# Altium PCB LEDA_Arcade Controller Mainboard (No Speaker).pcbdoc (part 2 of 2)
Units mil, origin at the board's own origin, x right, y up, seen from the top; angles counter-clockwise.
Board outline 4160.66 x 4159.61 mil, 2 copper layers (Top Layer, Bottom Layer); 47 components, 129 nets, 313 pads, 144 vias.
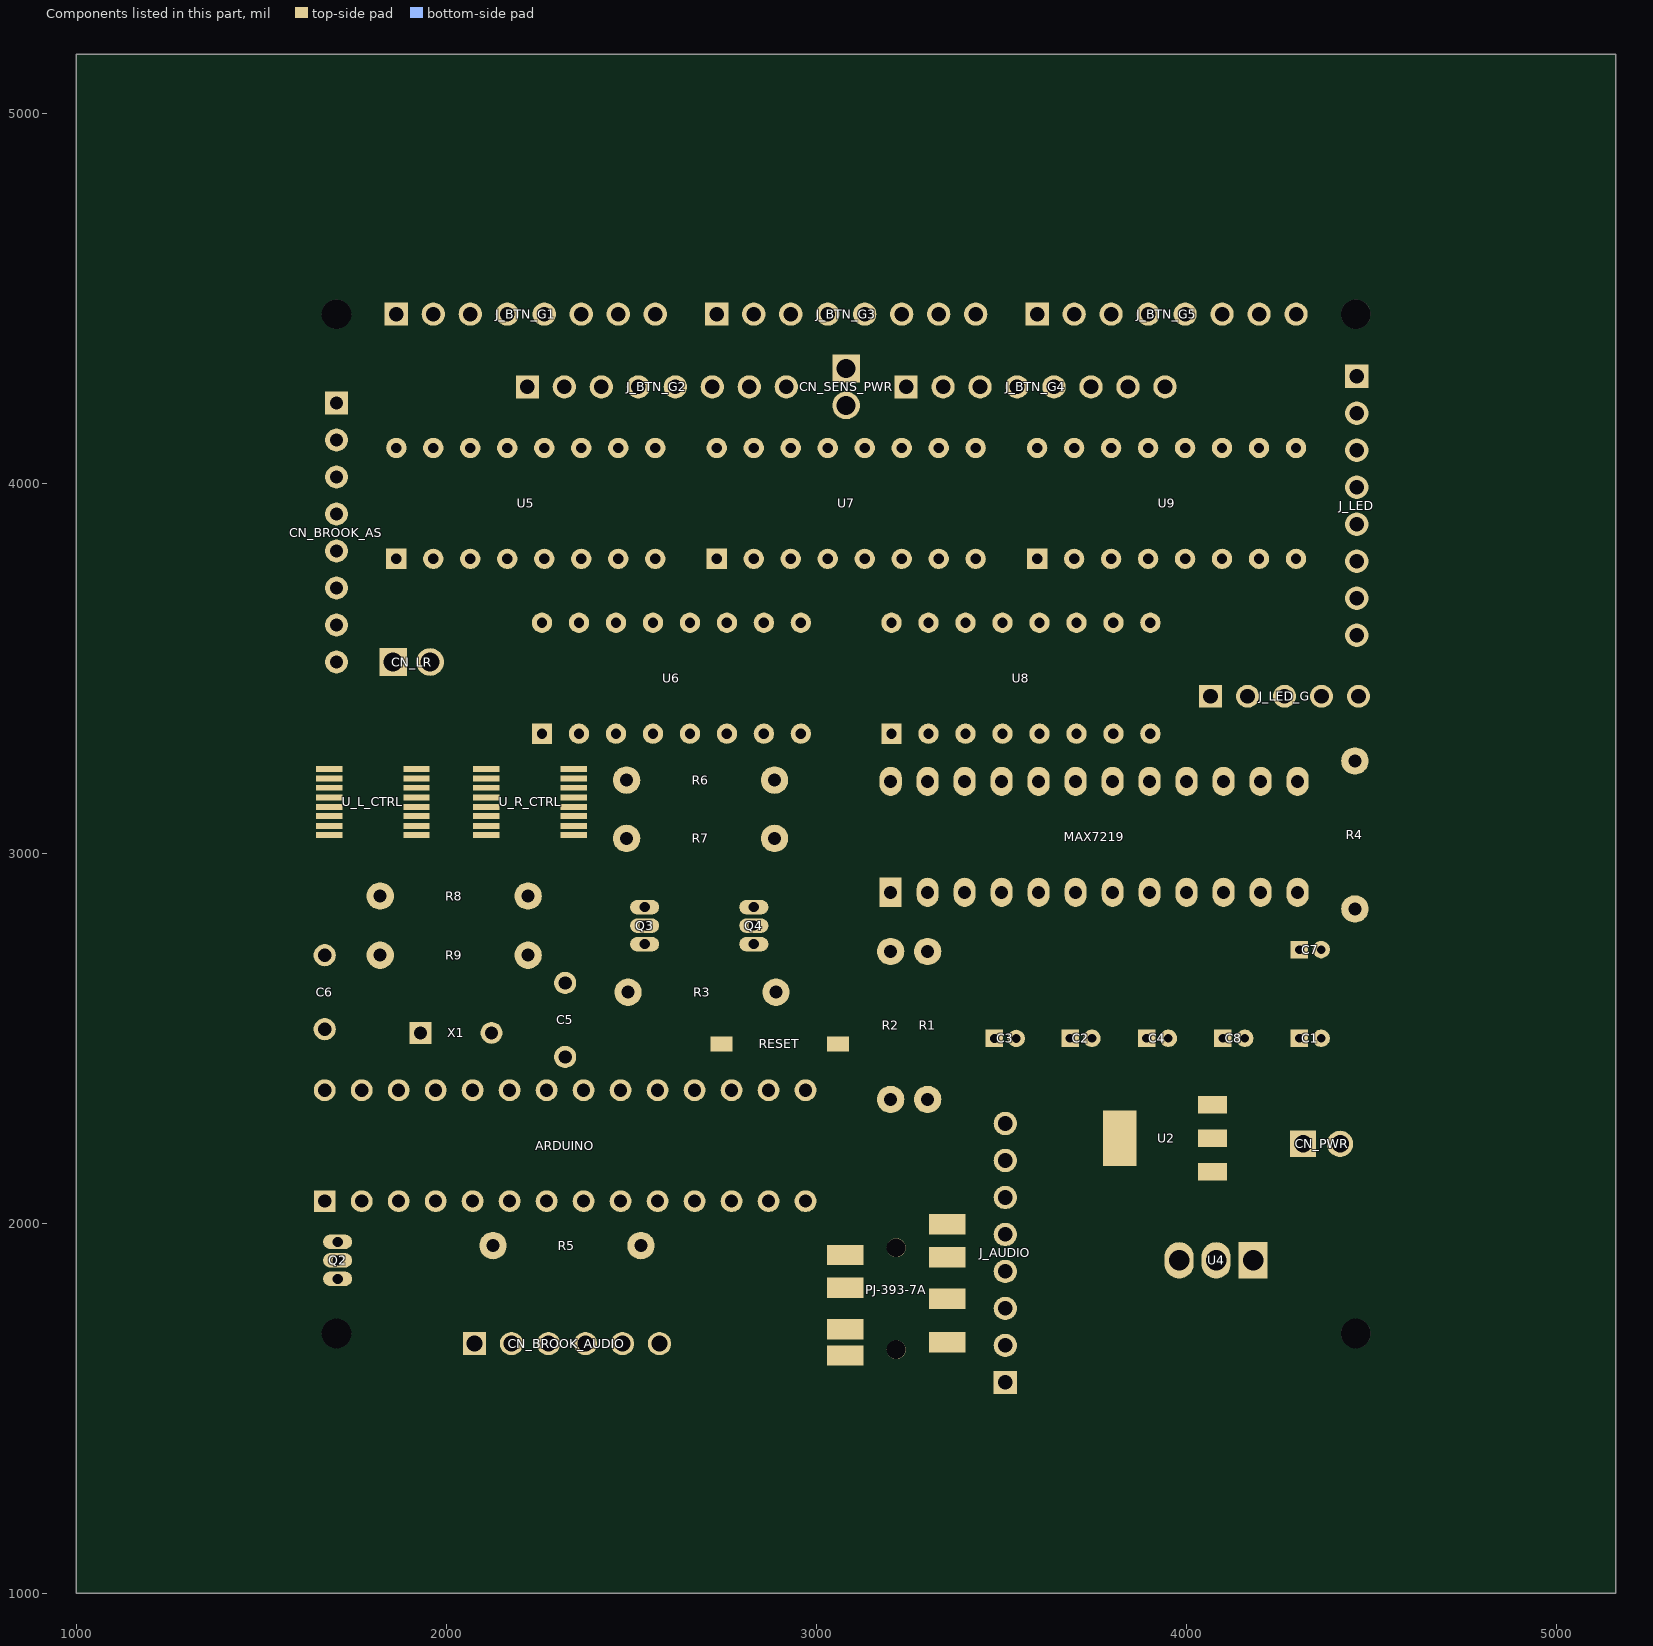
[diagram p2: the components of this part, seen from the top]

## Other copper
Top Layer:
  region net PIN_SPI_SCK: 2541.58,2357.76 2572.9,2389.08 2546.16,2391.57 2539.09,2384.5
  region net VCC: 2451.52,2337.46 2451.52,2381.75 2430.85,2364.61 2430.85,2354.61
  region net VCC: 2390.58,2337.46 2390.58,2381.75 2411.25,2364.61 2411.25,2354.61
  region net L_X_CTRL_2: 1941.58,2361.46 1972.9,2330.14 1946.16,2327.64 1939.09,2334.72
  region net PIN_R1: 2769.2,2089.08 2800.52,2057.76 2803.01,2084.5 2795.94,2091.57
  region net PIN_L1: 2669.2,2089.08 2700.52,2057.76 2703.01,2084.5 2695.94,2091.57
  region net ARDUINO_10: 2541.58,2057.76 2572.9,2089.08 2546.16,2091.57 2539.09,2084.5
  region net ARDUINO_9: 2469.2,2030.14 2500.52,2061.46 2503.01,2034.72 2495.94,2027.64
  region net ARDUINO_9: 2441.58,2057.76 2472.9,2089.08 2446.16,2091.57 2439.09,2084.5
  region net VCC: 2269.2,2030.14 2300.52,2061.46 2303.01,2034.72 2295.94,2027.64
  region net PIN_SENS_CE: 2041.58,2061.46 2072.9,2030.14 2046.16,2027.64 2039.09,2034.72
  region net PIN_SENS_LOAD: 1941.58,2057.76 1972.9,2089.08 1946.16,2091.57 1939.09,2084.5
  region net PIN_SENS_DATA: 1798.89,2069.46 1757.79,2085.99 1781.05,2098.91 1791.05,2094.89
  region net AGND: 2544.62,1676.57 2578.03,1643.16 2549.27,1640.74 2542.2,1647.81
  region net AS_HALF_VCC: 1733.01,3924.59 1706.46,3886.41 1734.65,3888.94 1740.45,3897.28
  region net AS_HALF_VCC: 1700.96,3748.15 1733.84,3715.26 1736.28,3743.51 1729.21,3750.58
  region net AS_HALF_VCC: 1700.99,3686.27 1733.84,3719.17 1736.3,3690.93 1729.24,3683.85
  region net PIN_SPI_SCK: 1985.34,3777.76 1944.09,3777.76 1959.71,3758.51 1969.71,3758.51
  region net BTN_5: 2091.81,3800.66 2056.65,3822.24 2079.92,3830.54 2088.68,3825.16
  region net BTN_6: 2191.62,3790.26 2166.99,3823.35 2191.73,3822.35 2197.76,3814.25
  region net BTN_7: 2292.13,3798.03 2259.21,3822.89 2283.24,3828.87 2291.3,3822.78
  region net BTN_8: 2337.27,3794.22 2366.43,3823.39 2344.59,3823.14 2337.52,3816.07
  region net PIN_SENS_CE: 1962.99,4068.5 1992.16,4097.67 1994.72,4073.01 1987.65,4065.94
  region net VCC: 1862.99,4068.5 1892.16,4097.67 1894.72,4073.01 1887.65,4065.94
  region net PIN_SPI_SCK: 2379.04,3341.69 2337.79,3341.69 2353.41,3360.94 2363.41,3360.94
  region net BTN_13: 2456.71,3350.95 2485.86,3321.76 2488.44,3346.42 2481.37,3353.5
  region net BTN_14: 2557.49,3350.99 2585.8,3320.98 2589.08,3345.56 2582.21,3352.83
  region net BTN_15: 2657.49,3350.99 2685.8,3320.98 2689.08,3345.56 2682.21,3352.83
  region net BTN_16: 2785.43,3318.4 2760.09,3350.95 2784.86,3350.48 2791.05,3342.53
  region net U5_10: 2962.07,3650.76 2930.91,3623.73 2930.09,3648.5 2937.66,3655.07
  region net BTN_12: 2475.06,3645.39 2434.62,3637.28 2446.05,3659.21 2456.05,3661.22
  region net PIN_SENS_CE: 2331.02,3621.13 2359.48,3650.98 2334.77,3652.96 2327.87,3645.72
  region net PIN_SENS_CE: 2357.49,3650.99 2385.8,3620.99 2389.08,3645.56 2382.21,3652.84
  region net VCC: 2240.22,3602.88 2240.22,3644.13 2220.97,3628.5 2220.97,3618.5
  region net BTN_21: 2957.18,3803.9 2919.67,3821.07 2941.59,3832.21 2951.29,3827.77
  region net BTN_22: 3057.84,3801.26 3022.21,3822.05 3045.26,3830.89 3054.19,3825.67
  region net BTN_23: 3157.18,3803.9 3119.67,3821.07 3141.59,3832.21 3151.29,3827.77
  region net BTN_24: 3251.48,3814.14 3210.23,3814.14 3225.85,3833.39 3235.85,3833.39
  region net U6_10: 3412.66,4075.32 3412.66,4116.57 3402.39,4100.95 3402.39,4090.95
  region net U7_10: 3329.13,4123.39 3358.3,4094.22 3360.86,4118.88 3353.79,4125.96
  region net BTN_20: 2951.48,4114.14 2910.23,4114.14 2925.85,4124.41 2935.85,4124.41
  region net PIN_SENS_CE: 2848.98,4075.26 2808.07,4080.55 2821.05,4059.46 2831.05,4058.17
  region net VCC: 2751.5,4077.78 2710.25,4077.73 2725.9,4058.5 2735.9,4058.51
  region net PIN_SPI_SCK: 3311.02,3297.11 3276.14,3319.14 3278.97,3294.59 3287.63,3289.11
  region net BTN_29: 3401.57,3350.95 3430.74,3321.78 3433.3,3346.44 3426.23,3353.51
  region net BTN_30: 3501.57,3350.95 3530.74,3321.78 3533.3,3346.44 3526.23,3353.51
  region net U8_10: 3801.57,3650.95 3830.74,3621.78 3833.3,3646.44 3826.23,3653.51
  region net BTN_28: 3401.55,3650.95 3430.74,3621.8 3433.29,3646.47 3426.21,3653.53
  region net VCC: 3184.07,3603.85 3225.2,3606.88 3211.05,3586.54 3201.05,3585.8
  region net BTN_37: 3824.31,3799.23 3790.33,3822.62 3814.05,3829.67 3822.42,3823.9
  region net BTN_38: 3924.31,3799.21 3890.36,3822.63 3914.08,3829.65 3922.45,3823.88
  region net BTN_39: 4024.5,3796.62 3992.9,3823.14 4017.23,3827.85 4024.92,3821.4
  region net BTN_40: 4124.31,3799.23 4090.33,3822.62 4114.05,3829.67 4122.42,3823.9
  region net U8_10: 4301.51,4068.82 4269.53,4094.87 4269.47,4070.09 4277.26,4063.74
  region net BTN_36: 3817.63,4114.14 3776.38,4114.14 3792.01,4133.39 3802.01,4133.39
  region net PIN_SENS_CE: 3717.56,4077.67 3676.31,4077.84 3691.85,4058.53 3701.85,4058.49
  region net VCC: 3569.56,4097.65 3598.74,4068.5 3574.08,4065.92 3567.01,4072.99
  region net ARDUINO_10: 2125.97,2543.87 2092.53,2514.83 2091.91,2541.67 2099.48,2548.25
  region net ARDUINO_10: 2144.2,2495.08 2099.91,2495.08 2117.05,2474.41 2127.05,2474.41
  region net LED_3: 4429.62,4091.58 4463.03,4058.17 4434.27,4055.75 4427.2,4062.82
  region net LED_4: 4429.62,3991.58 4463.03,3958.17 4434.27,3955.75 4427.2,3962.82
  region net LED_5: 4429.62,3891.58 4463.03,3858.17 4434.27,3855.75 4427.2,3862.82
  region net LED_7: 4429.62,3691.58 4463.03,3658.17 4434.27,3655.75 4427.2,3662.82
  region net LED_8: 4459.08,3558.17 4492.49,3591.58 4494.91,3562.82 4487.84,3555.75
  region net LED_G4: 4335.11,3426.55 4367.99,3393.67 4339.75,3391.23 4332.67,3398.3
  region net LED_G3: 4235.11,3426.55 4267.99,3393.67 4239.75,3391.23 4232.67,3398.3
  region net BTN_5: 2233.28,4459.73 2266.69,4426.32 2237.93,4423.9 2230.86,4430.97
  region net BTN_6: 2333.28,4459.7 2366.72,4426.32 2337.96,4423.87 2330.88,4430.94
  region net BTN_7: 2433.28,4459.73 2466.69,4426.32 2437.93,4423.9 2430.86,4430.97
  region net BTN_8: 2533.29,4459.81 2566.61,4426.32 2537.84,4423.97 2530.79,4431.06
  region net BTN_12: 2542.67,4240.08 2495.42,4240.07 2514.05,4218.02 2524.05,4218.03
  region net BTN_13: 2641.15,4238.48 2594.03,4241.77 2611.05,4218.48 2621.05,4217.78
  region net BTN_14: 2687.61,4262.88 2721.01,4229.47 2692.26,4227.05 2685.19,4234.12
  region net BTN_15: 2787.61,4262.88 2821.01,4229.47 2792.26,4227.05 2785.19,4234.12
  region net BTN_16: 2887.61,4262.87 2921.02,4229.47 2892.26,4227.04 2885.19,4234.11
  region net BTN_20: 2999.42,4459.73 3032.83,4426.32 3004.07,4423.9 2997,4430.97
  region net BTN_21: 3099.42,4459.7 3132.85,4426.32 3104.1,4423.88 3097.02,4430.94
  region net BTN_22: 3199.42,4459.7 3232.85,4426.32 3204.1,4423.88 3197.02,4430.94
  region net BTN_23: 3299.42,4459.73 3332.83,4426.32 3304.07,4423.9 3297,4430.97
  region net BTN_24: 3399.42,4459.7 3432.85,4426.32 3404.1,4423.88 3397.02,4430.94
  region net BTN_28: 3559.76,4234.45 3514.28,4247.25 3526.05,4221.03 3536.05,4218.22
  region net BTN_29: 3666.29,4240.07 3619.04,4240.07 3637.66,4218.02 3647.66,4218.02
  region net BTN_30: 3766.29,4240.07 3719.04,4240.07 3737.66,4218.02 3747.66,4218.02
  region net BTN_36: 3865.57,4459.73 3898.98,4426.32 3870.22,4423.9 3863.15,4430.97
  region net BTN_37: 3965.57,4459.73 3998.98,4426.32 3970.22,4423.9 3963.15,4430.97
  region net BTN_38: 4065.57,4459.69 4099.01,4426.32 4070.26,4423.87 4063.18,4430.93
  region net BTN_39: 4165.57,4459.73 4198.98,4426.32 4170.22,4423.9 4163.15,4430.97
  region net BTN_40: 4265.57,4459.73 4298.98,4426.32 4270.22,4423.9 4263.15,4430.97
  region net L1: 1992.64,3509.43 1943.76,3481.88 1976.05,3470.03 1986.05,3475.66
  region net EXT_AJ_GND': 2123.74,1902.68 2162.98,1941.92 2165.21,1907.52 2158.14,1900.45
  region net VCC: 2501.58,1911.86 2501.58,1967.36 2475.68,1944.61 2475.68,1934.61
  region net AS_GND: 2850.22,3038.09 2889.47,3077.33 2855.07,3079.56 2848,3072.49
  region net AS_HALF_VCC: 2484.83,3003.48 2524.08,3042.72 2526.31,3008.32 2519.24,3001.25
  region net AS_HALF_VCC: 2917.98,3218.37 2903.6,3164.76 2934.31,3179.28 2937.3,3190.43
  region net AS_VCC: 2476.13,3162.59 2453.49,3213.26 2438.93,3182.36 2443.4,3172.36
  region net Q3_2: 2245.53,2856.86 2245.53,2912.36 2271.43,2889.61 2271.43,2879.61
  region net PIN_R1: 1845.53,2856.86 1845.53,2912.36 1871.43,2889.61 1871.43,2879.61
  region net Q4_2: 2218.74,2761.53 2257.98,2722.29 2260.21,2756.69 2253.14,2763.76
  region net PIN_L1: 1818.74,2687.68 1857.98,2726.92 1860.21,2692.52 1853.14,2685.45
  region net ARDUINO_1: 2525.84,2637.2 2499.2,2588.51 2532.74,2595.85 2537.74,2604.99
  region net VCC: 2915.53,2596.86 2915.53,2652.36 2941.43,2629.61 2941.43,2619.61
  region net VCC: 4419.13,2851.92 4458.37,2812.68 4423.97,2810.45 4416.9,2817.52
  region net GND_SENS: 3198.74,2371.53 3237.98,2332.29 3240.21,2366.69 3233.14,2373.76
  region net AJ_MIC': 3479.62,1667.63 3513.03,1701.04 3484.27,1703.46 3477.2,1696.39
  region net AGND: 3479.62,1767.63 3513.03,1801.04 3488.17,1799.56 3481.1,1792.49
  region net EXT_AJ_GND': 3499.8,1840.19 3483.27,1884.45 3469.02,1859.61 3472.75,1849.61
  region net AJ_R: 3479.62,1971.58 3513.02,1938.17 3484.27,1935.75 3477.2,1942.82
  region net AJ_R': 3523.28,2040.58 3480.73,2061.1 3487.66,2033.28 3497.2,2028.68
  region net AJ_L': 3479.62,2171.58 3513.03,2138.17 3484.27,2135.75 3477.2,2142.82
  region net AJ_L: 3490.22,2245.98 3490.22,2293.23 3468.17,2274.61 3468.17,2264.61
  region net VCC: 4387.14,2748.14 4353.89,2760.39 4371.06,2771.69 4381.4,2767.88
  region net VCC: 4382.83,2723.98 4347.39,2723.98 4360.11,2707.45 4370.11,2707.45
  region net GND_SENS: 3969.53,2484.38 3934.1,2484.38 3946.81,2467.85 3956.81,2467.85
  region net VCC: 3558.29,2483.96 3522.85,2484 3535.56,2469.11 3545.56,2469.1
  region net VCC: 3556.43,2482.09 3555.99,2517.52 3572.68,2505.01 3572.8,2495.01
  region net ARDUINO_9: 2319.17,2619.66 2350.99,2651.48 2353.47,2624.26 2346.4,2617.19
  region net ARDUINO_10: 1669.17,2554.55 1700.99,2522.73 1703.47,2549.95 1696.4,2557.02
  region net AGND: 3289.74,1786.33 3288.18,1804.26 3296.89,1801.03 3297.77,1791.03
  region net AJ_MIC: 3288.99,1665.61 3288.99,1683.61 3297.39,1679.61 3297.39,1669.61
  region net AJ_L: 3014.25,1923.37 3013.73,1905.38 3022.24,1909.13 3022.53,1919.13
  region net AJ_R: 3293.03,1893.86 3280.3,1906.58 3289.07,1909.69 3296.14,1902.62
  region net AS_HALF_VCC: 2399.13,3159.4 2397.2,3141.51 2389.27,3146.36 2390.35,3156.36
  region net AS_VCC: 1973.12,3165.61 1973.12,3183.61 1964.72,3179.61 1964.72,3169.61
  region net L_X: 1608.99,3165.61 1608.99,3183.61 1617.39,3179.61 1617.39,3169.61
  region net AS_HALF_VCC: 1634.91,3141.51 1632.98,3159.4 1641.76,3156.36 1642.84,3146.36
  region net R_X: 2171.91,3160.08 2154.93,3154.11 2155.41,3163.18 2165.87,3166.86
  region net AS_GND: 1973.54,3133.96 1972.71,3115.98 1964.5,3120.36 1964.96,3130.36
  region net AS_GND: 2297.39,3115.98 2296.56,3133.96 2305.13,3130.36 2305.59,3120.36
  region net VCC: 2008.83,3220.03 2007.45,3237.97 1999.38,3233.36 2000.15,3223.36
  region net VCC: 2298.99,3220.61 2298.99,3238.61 2307.39,3234.61 2307.39,3224.61
  region net VDD: 4018.99,2220.61 4018.99,2238.61 4027.39,2234.61 4027.39,2224.61
  region net L_X_CTRL_0: 1864.39,3090.98 1863.57,3108.96 1872.14,3105.36 1872.6,3095.36
  region net L_X_CTRL_1: 1973.25,3065.49 1972.98,3083.48 1964.64,3079.36 1964.79,3069.36
  region net R_X_CTRL_0: 2403.54,3108.96 2402.71,3090.98 2394.5,3095.36 2394.96,3105.36
  region net R_X_CTRL_2: 2403.25,3040.49 2402.98,3058.48 2394.64,3054.36 2394.79,3044.36
  region net R_X_CTRL_1: 2297.12,3083.48 2296.84,3065.49 2305.3,3069.36 2305.46,3079.36
  region net LED_3: 3638.99,3390.61 3638.99,3408.61 3647.39,3404.61 3647.39,3394.61
  region net LED_4: 3728.99,3385.61 3728.99,3403.61 3737.39,3399.61 3737.39,3389.61
  region net LED_5: 3833.03,3393.85 3820.3,3406.58 3829.07,3409.69 3836.14,3402.62
  region net LED_8: 3913.03,3008.85 3900.3,3021.58 3909.07,3024.69 3916.14,3017.62
  region net LED_8: 3392.05,3047.54 3410.05,3047.54 3406.05,3055.94 3396.05,3055.94
  region net VDD: 2972.05,3722.54 2990.05,3722.54 2986.05,3730.94 2976.05,3730.94
  region net GND_SENS: 3358.99,4320.61 3358.99,4338.61 3367.39,4334.61 3367.39,4324.61
  region net GND_SENS: 3051.8,3081.58 3039.08,3068.85 3035.97,3077.62 3043.04,3084.69
  region net VCC: 3318.99,3545.61 3318.99,3563.61 3327.39,3559.61 3327.39,3549.61
  region net PIN_SENS_DATA: 2622.05,3841.67 2640.05,3841.67 2636.05,3833.27 2626.05,3833.27
  region net PIN_SENS_DATA: 2249.91,3084.92 2267.05,3079.41 2266.05,3088.55 2256.05,3091.77
  region net PIN_SENS_DATA: 1777.05,2236.67 1795.05,2236.67 1791.05,2228.27 1781.05,2228.27
  region net PIN_LED_DATA: 3028.03,2945.36 3015.3,2932.63 3024.07,2929.52 3031.14,2936.59
  region net U5_10: 2906.8,3967.63 2894.08,3980.36 2890.97,3971.59 2898.04,3964.52
  region net VCC: 2740.04,3932.55 2722.04,3932.53 2726.03,3940.94 2736.03,3940.95
  region net PIN_SENS_LOAD: 1840.63,3020.36 1829.21,3034.27 1825.24,3025.86 1831.62,3018.1
  region net PIN_SENS_LOAD: 2227.05,3107.54 2245.05,3107.54 2241.05,3115.94 2231.05,3115.94
  region net AS_HALF_VCC: 2276.8,2931.58 2264.08,2918.85 2260.97,2927.62 2268.04,2934.69
  region net PIN_SENS_CE: 2817.05,3932.54 2835.05,3932.54 2831.05,3940.94 2821.05,3940.94
  region net PIN_SENS_CE: 2561.8,3947.63 2549.08,3960.36 2545.97,3951.59 2553.04,3944.52
  region net PIN_SPI_SCK: 4038.99,3615.61 4038.99,3633.61 4047.39,3629.61 4047.39,3619.61
  region net U7_10: 3462.05,4012.54 3480.05,4012.54 3476.05,4020.94 3466.05,4020.94
  region net PIN_SENS_CE: 3272.58,3882.93 3262.91,3867.75 3272.08,3866.51 3277.58,3875.15
  region net PIN_SENS_CE: 3277.05,3742.54 3295.05,3742.54 3291.05,3750.94 3281.05,3750.94
  region net PIN_SENS_CE: 3705.1,3917.49 3687.1,3917.59 3691.14,3925.97 3701.14,3925.92
  region net U6_10: 3063.03,3568.85 3050.3,3581.58 3059.07,3584.69 3066.14,3577.62
  region net U6_10: 3192.05,3946.67 3210.05,3946.67 3206.05,3938.27 3196.05,3938.27
  region net U6_10: 3273.03,3953.85 3260.3,3966.58 3269.07,3969.69 3276.14,3962.62
  region net PIN_SENS_CE: 1966.8,3886.58 1954.08,3873.85 1950.97,3882.62 1958.04,3889.69
  region net PIN_SPI_SCK: 2278.99,2570.61 2278.99,2588.61 2287.39,2584.61 2287.39,2574.61
  region net PIN_SPI_SCK: 3043.03,3203.85 3030.3,3216.58 3039.07,3219.69 3046.14,3212.62
  region net PIN_LED_LOAD: 3362.05,2507.54 3380.05,2507.54 3376.05,2514.61 3366.05,2514.61
  region net VCC: 3197.05,3512.54 3215.05,3512.54 3211.05,3520.94 3201.05,3520.94
  region net VCC: 3198.12,3495.61 3198.12,3513.61 3189.72,3509.61 3189.72,3499.61
  region net VCC: 3337.05,3406.67 3355.05,3406.67 3351.05,3398.27 3341.05,3398.27
  region net VCC: 3117.05,4021.67 3135.05,4021.67 3131.05,4013.27 3121.05,4013.27
  region net AGND: 2107.55,1660.77 2089.86,1643.1 2105.78,1637.8 2112.85,1644.87
  region net AGND: 2044.56,1688.41 2062.22,1706.1 2046.32,1711.4 2039.25,1704.33
  region net AS_HALF_VCC: 1675.31,3236.36 1700.31,3236.36 1709.88,3251.36 1695.74,3251.36
  region net AS_HALF_VCC: 1693.83,3236.36 1718.72,3234 1731.41,3247.86 1718.51,3249.09
  region net AS_HALF_VCC: 1718.72,3210.36 1718.72,3194.36 1733.72,3197.36 1733.72,3207.36
  region net AS_HALF_VCC: 1718.72,3210.36 1718.72,3194.36 1733.72,3197.36 1733.72,3207.36
  region net L_X: 1647.72,3169.36 1647.72,3185.36 1632.72,3179.61 1632.72,3169.61
  region net AS_HALF_VCC: 1695.72,3143.36 1670.72,3143.36 1678.22,3128.36 1688.22,3128.36
  region net AS_HALF_VCC: 1718.72,3159.36 1718.72,3143.36 1733.72,3146.36 1733.72,3156.36
  region net AS_HALF_VCC: 1647.72,3143.36 1647.72,3159.36 1632.72,3156.36 1632.72,3146.36
  region net AS_HALF_VCC: 1670.72,3133.36 1695.72,3133.36 1688.22,3148.36 1678.22,3148.36
  region net L_X_CTRL_2: 1905.31,3041.36 1883.94,3041.36 1870.74,3026.36 1884.88,3026.36
  region net L_X_CTRL_1: 1954.94,3082.36 1954.94,3066.36 1969.94,3069.36 1969.94,3079.36
  region net L_X_CTRL_0: 1883.94,3092.36 1883.94,3108.36 1868.94,3105.36 1868.94,3095.36
  region net AS_GND: 1954.94,3133.36 1954.94,3117.36 1969.94,3120.36 1969.94,3130.36
  region net AS_HALF_VCC: 1954.94,3159.36 1954.94,3143.36 1969.94,3146.36 1969.94,3156.36
  region net AS_HALF_VCC: 1883.94,3143.36 1883.94,3159.36 1868.94,3156.36 1868.94,3146.36
  region net AS_HALF_VCC: 1954.94,3159.36 1954.94,3143.36 1969.94,3146.36 1969.94,3156.36
  region net AS_VCC: 1954.94,3185.36 1954.94,3169.36 1969.94,3169.61 1969.94,3179.61
  region net AS_HALF_VCC: 1883.94,3194.36 1883.94,3210.36 1868.94,3207.36 1868.94,3197.36
  region net AS_HALF_VCC: 1954.94,3210.36 1954.94,3194.36 1969.94,3197.36 1969.94,3207.36
  region net VCC: 1954.94,3236.36 1954.94,3220.36 1969.94,3223.36 1969.94,3233.36
  region net AS_HALF_VCC: 2087.4,3236.36 2112.4,3236.36 2091.97,3251.36 2077.83,3251.36
  region net AS_HALF_VCC: 2072.44,3194.36 2072.44,3210.36 2057.44,3207.36 2057.44,3197.36
  region net AS_HALF_VCC: 2072.44,3194.36 2072.44,3210.36 2063.75,3207.31 2063.75,3197.31
  region net R_X: 2143.44,3185.36 2143.44,3169.36 2148.3,3172.36 2148.3,3182.36
  region net AS_HALF_VCC: 2072.44,3143.36 2072.44,3159.36 2057.44,3156.36 2057.44,3146.36
  region net AS_HALF_VCC: 2102.44,3143.36 2077.44,3143.36 2097.87,3128.36 2112.01,3128.36
  region net AS_HALF_VCC: 2072.44,3143.36 2072.44,3159.36 2064.25,3156.41 2064.25,3146.41
  region net AS_HALF_VCC: 2087.44,3133.36 2112.44,3133.36 2092.01,3148.36 2077.87,3148.36
  region net R_X_CTRL_2: 2379.66,3057.36 2379.66,3041.36 2394.66,3044.36 2394.66,3054.36
  region net R_X_CTRL_1: 2308.66,3066.36 2308.66,3082.36 2293.66,3079.36 2293.66,3069.36
  region net R_X_CTRL_0: 2379.66,3108.36 2379.66,3092.36 2394.66,3095.36 2394.66,3105.36
  region net AS_GND: 2379.66,3133.36 2379.66,3117.36 2394.66,3120.36 2394.66,3130.36
  region net AS_GND: 2308.66,3117.36 2308.66,3133.36 2293.66,3130.36 2293.66,3120.36
  region net AS_HALF_VCC: 2379.66,3159.36 2379.66,3143.36 2394.66,3146.36 2394.66,3156.36
  region net AS_HALF_VCC: 2308.66,3143.36 2308.66,3159.36 2294.25,3156.41 2294.25,3146.41
  region net AS_VCC: 2379.66,3185.36 2379.66,3169.36 2394.66,3172.36 2394.66,3182.36
  region net AS_HALF_VCC: 2308.66,3194.36 2308.66,3210.36 2293.75,3207.31 2293.75,3197.31
  region net VCC: 2308.66,3220.36 2308.66,3236.36 2293.66,3234.61 2293.66,3224.61
  region net PIN_LED_DATA: 3171.53,2882.11 3171.53,2907.11 3156.53,2899.61 3156.53,2889.61
  region net USB_RAW: 4280.62,2202.11 4280.62,2227.11 4265.62,2219.61 4265.62,2209.61
  region net USB_RAW: 4293.55,2250.04 4318.55,2250.04 4311.05,2265.04 4301.05,2265.04
  region net USB_RAW: 4328.55,2179.17 4303.55,2179.17 4311.05,2164.17 4321.05,2164.17
  region net VDD: 4031.68,2217.11 4031.68,2242.11 4016.68,2234.61 4016.68,2224.61
  region net USB_RAW: 4107.17,2296.53 4082.17,2296.53 4102.6,2281.53 4116.75,2281.53
  region net PIN_SENS_LOAD: 1892.22,3786.12 1874.54,3768.44 1890.45,3763.14 1897.52,3770.21
  region net PIN_SENS_LOAD: 2230.91,3311 2230.91,3336 2215.91,3328.5 2215.91,3318.5
  region net PIN_SENS_LOAD: 2248.55,3296 2230.91,3296 2231.05,3281 2241.05,3281
  region net PIN_SENS_LOAD: 3213.11,3351 3230.8,3333.34 3236.1,3349.24 3229.03,3356.31
  region net PIN_SENS_LOAD: 3609.51,3768.44 3584.51,3768.44 3592.01,3753.44 3602.01,3753.44
  region net ARDUINO_9: 1959.58,2502.75 1941.9,2485.08 1957.81,2479.77 1964.88,2486.84
  region net ARDUINO_1: 3029.01,2504.29 3051.35,2504.29 3030.92,2519.29 3016.78,2519.29
  region net LED_G1: 4057.55,3393.61 4035.05,3393.61 4022.98,3378.61 4037.12,3378.61
  region net VDD: 3061.15,4273.5 3043.46,4291.16 3038.15,4275.27 3045.23,4268.2
  region net R1: 1893.45,3479.8 1873.36,3479.8 1893.78,3464.8 1907.93,3464.8
  region net USB_RAW: 4220.45,1948.81 4220.45,1926.51 4235.45,1946.93 4235.45,1961.08
  region net AJ_MIC: 3479.56,1557.11 3479.56,1582.11 3464.56,1574.61 3464.56,1564.61
  region net AJ_MIC: 3393.91,1650.36 3368.91,1650.36 3389.34,1635.36 3403.48,1635.36
  region net AJ_MIC: 3304.64,1662.11 3304.64,1687.11 3289.64,1679.61 3289.64,1669.61
  region net AJ_L: 3080.65,1941.7 3105.65,1941.7 3115.22,1956.7 3101.07,1956.7
  region net AJ_L: 3029.05,1901.63 3029.05,1926.63 3014.05,1919.13 3014.05,1909.13
  region net AJ_R: 3403.07,1920.73 3403.07,1895.73 3418.07,1903.23 3418.07,1913.23
  region net AJ_R: 3304.64,1895.73 3304.64,1920.73 3294.67,1913.23 3294.67,1903.23
  region net AGND: 3403.07,1808.53 3403.07,1783.53 3418.07,1791.03 3418.07,1801.03
  region net AGND: 3304.64,1783.53 3304.64,1808.53 3289.64,1801.03 3289.64,1791.03
  region net AJ_L': 3353.31,2024.37 3378.31,2024.37 3387.88,2039.37 3373.74,2039.37
  region net AJ_R': 3127.48,1837.56 3127.48,1812.56 3142.48,1819.92 3142.48,1829.92
  region net EXT_AJ_GND': 3127.48,1733.54 3127.48,1708.54 3142.48,1728.97 3142.48,1743.11
  region net EXT_AJ_GND': 3029.05,1700.85 3029.05,1725.85 3014.05,1718.35 3014.05,1708.35
  region net AJ_MIC': 3127.48,1670.04 3127.48,1648.54 3142.48,1668.97 3142.48,1683.11
  region net USB_RAW: 4318.55,2476.38 4293.55,2476.38 4301.05,2461.38 4311.05,2461.38
  region net VCC: 4093.41,2476.38 4075.73,2494.06 4070.43,2478.15 4077.5,2471.08
  region net VCC: 4105.29,2523.63 4122.98,2505.96 4128.28,2521.86 4121.21,2528.93
  region net VCC: 4075.73,2522.19 4100.69,2523.63 4075.53,2537.2 4062.15,2536.43
  region net VCC: 3691.99,2523.63 3709.68,2505.96 3714.98,2521.86 3707.91,2528.93
  region net VCC: 3662.43,2487.51 3662.43,2512.51 3647.43,2505.01 3647.43,2495.01
  region net AGND: 1740.95,1937.11 1740.94,1962.11 1755.95,1954.61 1755.95,1944.61
  region net Q3_2: 2570.94,2792.11 2570.94,2817.11 2585.94,2809.61 2585.94,2799.61
  region net R1: 2501.16,2742.1 2501.16,2767.1 2486.16,2759.61 2486.16,2749.61
  region net Q4_2: 2804.78,2786.06 2791.9,2807.48 2782.83,2793.45 2788.14,2784.62
  region net L1: 2865.94,2742.11 2865.94,2767.11 2880.94,2759.61 2880.94,2749.61
  region net PIN_SPI_SCK: 4331.05,3203.98 4331.05,3185.24 4346.05,3189.61 4346.05,3199.61
  region net LED_8: 3413.55,3157.96 3388.55,3157.96 3396.05,3142.96 3406.05,3142.96
  region net VCC: 3686.33,3159.1 3671.64,3179.33 3663.87,3164.5 3669.82,3156.3
  region net LED_7: 4213.55,3231.25 4188.55,3231.25 4196.05,3246.25 4206.05,3246.25
  region net PIN_LED_LOAD: 4286.33,2859.1 4271.64,2879.33 4263.87,2864.5 4269.82,2856.3
  region net LED_G1: 3330.1,2909.76 3315.62,2930.14 3332.15,2932.77 3338.02,2924.5
  region net LED_G3: 3730.1,2909.76 3715.62,2930.14 3732.15,2932.77 3738.02,2924.5
  region net LED_G4: 3813.55,2931.2 3788.55,2931.2 3796.05,2946.2 3806.05,2946.2
  region net VCC: 3993.55,1946.78 3968.55,1946.78 3976.05,1961.78 3986.05,1961.78
Bottom Layer:
  region net VCC: 2469.2,2389.08 2500.52,2357.76 2503.01,2384.5 2495.94,2391.57
  region net VCC: 2441.58,2361.46 2472.9,2330.14 2446.16,2327.64 2439.09,2334.72
  region net L_X_CTRL_0: 2162.42,2331.37 2144.12,2371.7 2132.24,2347.86 2136.65,2338.13
  region net L_X_CTRL_1: 2093.2,2340.08 2048.91,2340.08 2066.05,2319.41 2076.05,2319.41
  region net R_X_CTRL_0: 1870.3,2389.12 1841.86,2355.17 1837.01,2381.57 1843.46,2389.27
  region net R_X_CTRL_1: 1793.2,2379.14 1748.91,2379.14 1766.05,2399.81 1776.05,2399.81
  region net R_X_CTRL_2: 1693.2,2340.08 1648.91,2340.08 1666.05,2319.41 1676.05,2319.41
  region net VCC: 2293.2,2079.14 2248.91,2079.14 2266.05,2099.81 2276.05,2099.81
  region net PIN_LED_LOAD: 2169.2,2030.14 2200.52,2061.46 2203.01,2034.72 2195.94,2027.64
  region net PIN_LED_DATA: 1869.2,2089.08 1900.52,2057.76 1903.01,2084.5 1895.94,2091.57
  region net AJ_MIC: 2174.08,1643.17 2207.49,1676.58 2209.91,1647.82 2202.84,1640.75
  region net AJ_DETECT: 2244.62,1672.63 2278.03,1706.04 2249.27,1708.46 2242.2,1701.39
  region net AJ_R: 2374.08,1706.03 2407.49,1672.63 2409.91,1701.39 2402.83,1708.46
  region net AJ_L: 2474.08,1706.03 2507.49,1672.62 2509.91,1701.38 2502.84,1708.45
  region net AGND: 2596.89,1650.97 2596.89,1698.22 2618.93,1679.6 2618.93,1669.6
  region net L_X: 1671.96,4019.15 1704.85,3986.27 1676.6,3983.83 1669.53,3990.9
  region net AS_HALF_VCC: 1671.96,3919.12 1704.87,3886.27 1676.62,3883.81 1669.55,3890.87
  region net R_X: 1700.99,3786.27 1733.84,3819.17 1736.3,3790.93 1729.24,3783.85
  region net AS_GND: 1726.18,3496.73 1679.68,3496.67 1697.95,3475 1707.95,3475.01
  region net PIN_SENS_DATA: 2585.34,4077.76 2544.09,4077.76 2559.72,4068.27 2569.72,4068.27
  region net U5_10: 2485.36,4114.11 2444.11,4114.16 2459.75,4133.39 2469.75,4133.38
  region net BTN_1: 2362.62,4068.53 2337.77,4101.45 2331.79,4077.42 2337.88,4069.36
  region net BTN_2: 2275.5,4070.65 2238.27,4088.4 2243.81,4064.43 2253.39,4059.87
  region net BTN_3: 2172.96,4069.71 2137.65,4091.05 2140.94,4066.57 2149.76,4061.24
  region net BTN_4: 2085.34,4114.14 2044.09,4114.14 2059.71,4133.39 2069.71,4133.39
  region net PIN_SPI_SCK: 2385.87,3321.97 2353.46,3296.45 2377.62,3290.97 2385.53,3297.2
  region net PIN_SPI_SCK: 2356.71,3350.95 2385.86,3321.76 2388.44,3346.42 2381.37,3353.5
  region net U6_10: 2879.04,3605.32 2837.79,3605.32 2853.41,3586.07 2863.41,3586.07
  region net BTN_9: 2730.96,3625.2 2760.16,3596.06 2735.5,3593.48 2728.42,3600.54
  region net BTN_10: 2631.01,3621.13 2659.48,3650.98 2634.77,3652.96 2627.86,3645.72
  region net BTN_11: 2556.71,3596.06 2585.86,3625.25 2588.44,3600.59 2581.37,3593.51
  region net PIN_SENS_CE: 2362.07,3650.76 2330.91,3623.73 2330.09,3648.5 2337.66,3655.07
  region net VCC: 2256.71,3596.06 2285.86,3625.25 2288.44,3600.59 2281.37,3593.51
  region net VCC: 2230.97,3625.23 2260.14,3596.06 2235.48,3593.5 2228.4,3600.57
  region net PIN_SPI_SCK: 2829.13,3768.5 2858.3,3797.67 2860.86,3773.01 2853.79,3765.94
  region net BTN_17: 3203.37,4096.87 3233.37,4068.56 3208.8,4065.28 3201.52,4072.15
  region net BTN_18: 3103.37,4096.87 3133.37,4068.56 3108.8,4065.28 3101.52,4072.15
  region net BTN_19: 3039.7,4121.98 3003.91,4101.47 3007.74,4125.85 3016.73,4131
  region net VCC: 2751.48,4077.76 2710.23,4077.76 2725.85,4064.81 2735.85,4064.81
  region net PIN_SPI_SCK: 3311.02,3297.11 3276.14,3319.14 3278.97,3294.59 3287.63,3289.11
  region net PIN_SPI_SCK: 3301.57,3350.95 3330.74,3321.78 3333.3,3346.44 3326.23,3353.51
  region net BTN_31: 3630.29,3328.75 3594.71,3349.63 3617.79,3358.41 3626.7,3353.18
  region net BTN_32: 3702.43,3350.99 3730.67,3320.92 3734.01,3345.49 3727.16,3352.78
  region net U7_10: 3875.85,3621.78 3905.02,3650.95 3880.36,3653.51 3873.29,3646.44
  region net BTN_25: 3718.6,3600.66 3678.71,3611.17 3688.16,3588.78 3699.35,3585.83
  region net BTN_26: 3616.09,3599.16 3577.55,3613.85 3584.85,3590.47 3595.09,3586.57
  region net BTN_27: 3523.92,3641.69 3482.67,3641.69 3498.29,3660.94 3508.29,3660.94
  region net PIN_SENS_CE: 3301.55,3596.06 3330.74,3625.21 3333.29,3600.54 3326.21,3593.48
  region net PIN_SENS_CE: 3323.92,3641.69 3282.67,3641.69 3298.29,3660.94 3308.29,3660.94
  region net VCC: 3201.57,3596.06 3230.74,3625.23 3233.3,3600.57 3226.23,3593.5
  region net PIN_SPI_SCK: 3694.1,3768.6 3724.5,3796.48 3726,3771.73 3718.62,3764.97
  region net BTN_33: 4069.56,4097.64 4098.76,4068.5 4074.1,4065.91 4067.02,4072.98
  region net BTN_34: 3969.56,4097.67 3998.73,4068.5 3974.07,4065.94 3967,4073.01
  region net BTN_35: 3894.93,4123.37 3870.06,4090.46 3864.09,4114.5 3870.18,4122.55
  region net LED_2: 4429.62,4191.58 4463.03,4158.17 4434.27,4155.75 4427.2,4162.82
  region net LED_6: 4429.62,3791.58 4463.03,3758.17 4434.27,3755.75 4427.2,3762.82
  region net LED_G5: 4464.11,3393.67 4496.99,3426.55 4499.43,3398.3 4492.36,3391.23
  region net LED_G2: 4164.11,3393.67 4196.99,3426.55 4199.43,3398.3 4192.36,3391.23
  region net BTN_2: 1933.28,4459.71 1966.7,4426.32 1937.94,4423.89 1930.87,4430.95
  region net BTN_3: 2033.28,4459.71 2066.7,4426.32 2037.94,4423.89 2030.87,4430.95
  region net BTN_4: 2133.28,4459.73 2166.69,4426.32 2137.93,4423.9 2130.86,4430.97
  region net BTN_10: 2350.41,4258.04 2312.28,4230.14 2340.28,4223.31 2348.45,4229.28
  region net BTN_11: 2417.19,4229.46 2450.47,4263 2453,4234.25 2445.96,4227.15
  region net BTN_18: 2799.42,4459.7 2832.85,4426.32 2804.1,4423.88 2797.02,4430.94
  region net BTN_19: 2928.88,4426.32 2962.29,4459.73 2964.71,4430.97 2957.64,4423.9
  region net BTN_26: 3340.69,4229.47 3374.1,4262.87 3376.52,4234.11 3369.44,4227.04
  region net BTN_27: 3440.69,4229.47 3474.1,4262.88 3474.59,4236.05 3467.52,4228.98
  region net BTN_31: 3840.69,4229.47 3874.1,4262.87 3876.52,4234.11 3869.44,4227.04
  region net BTN_32: 3940.69,4229.47 3974.1,4262.87 3976.52,4234.11 3969.44,4227.04
  region net BTN_34: 3720.63,4436.92 3673.38,4436.92 3692.01,4414.88 3702.01,4414.88
  region net BTN_35: 3817.51,4433.85 3770.72,4440.4 3786.05,4415.99 3796.05,4414.59
  region net GND_SENS: 3078.51,4248.23 3118.18,4208.56 3120.39,4243.38 3113.32,4250.45
  region net EXT_AJ_GND': 2089.13,1941.92 2128.37,1902.68 2093.97,1900.45 2086.9,1907.52
  region net AS_HALF_VCC: 2503.85,3073.43 2452.3,3052.84 2463.42,3085.17 2473.52,3089.21
  region net AS_HALF_VCC: 2472.69,3074.46 2455.17,3021.8 2437.59,3051 2441.12,3061.61
  region net AS_VCC: 2475.75,3162.71 2453.66,3213.62 2438.8,3182.79 2443.08,3172.92
  region net AGND: 3336.24,2323.16 3285.3,2301.13 3316.05,2286.21 3326.05,2290.54
  region net ARDUINO_1: 2466.58,2596.86 2466.58,2652.36 2440.68,2629.61 2440.68,2619.61
  region net VCC: 2866.58,2596.86 2866.58,2652.36 2840.68,2629.61 2840.68,2619.61
  region net MAX7219_18: 4419.13,3251.92 4458.37,3212.68 4423.97,3210.45 4416.9,3217.52
  region net GND_SENS: 3164.13,2332.29 3203.37,2371.53 3168.97,2373.76 3161.9,2366.69
  region net AGND: 3281.8,1782.63 3269.08,1795.36 3265.97,1786.59 3273.04,1779.52
  region net AGND: 3277.73,1806.14 3292.91,1796.46 3294.15,1805.63 3285.51,1811.14
  region net AJ_MIC: 3272.05,1666.67 3290.05,1666.67 3286.05,1658.27 3276.05,1658.27
  region net AJ_L: 2998.12,1905.61 2998.12,1923.61 2989.72,1919.61 2989.72,1909.61
  region net AJ_R: 3273.12,1885.61 3273.12,1903.61 3264.72,1899.61 3264.72,1889.61
  region net AS_HALF_VCC: 2418.03,3150.36 2405.3,3137.63 2414.07,3134.52 2421.14,3141.59
  region net AS_VCC: 1988.99,3165.61 1988.99,3183.61 1997.39,3179.61 1997.39,3169.61
  region net AS_VCC: 1981.8,3186.58 1969.08,3173.85 1965.97,3182.62 1973.04,3189.69
  region net L_X: 1592.05,3182.54 1610.05,3182.54 1606.05,3190.94 1596.05,3190.94
  region net AS_HALF_VCC: 1617.05,3157.54 1635.05,3157.54 1631.05,3165.94 1621.05,3165.94
  region net R_X: 2158.12,3140.61 2158.12,3158.61 2149.72,3154.61 2149.72,3144.61
  region net AS_GND: 1973.12,3115.61 1973.12,3133.61 1964.72,3129.61 1964.72,3119.61
  region net AS_GND: 1988.99,3115.61 1988.99,3133.61 1997.39,3129.61 1997.39,3119.61
  region net AS_GND: 2281.11,3115.61 2281.11,3133.61 2272.71,3129.61 2272.71,3119.61
  region net VCC: 2023.99,3220.61 2023.99,3238.61 2032.39,3234.61 2032.39,3224.61
  region net VCC: 2007.05,3237.54 2025.05,3237.54 2021.05,3245.94 2011.05,3245.94
  region net VCC: 2283.12,3220.61 2283.12,3238.61 2274.72,3234.61 2274.72,3224.61
  region net VDD: 4002.05,2237.54 4020.05,2237.54 4016.05,2245.94 4006.05,2245.94
  region net L_X_CTRL_0: 1848.12,3090.61 1848.12,3108.61 1839.72,3104.61 1839.72,3094.61
  region net L_X_CTRL_1: 1973.12,3065.61 1973.12,3083.61 1964.72,3079.61 1964.72,3069.61
  region net R_X_CTRL_0: 2403.12,3090.61 2403.12,3108.61 2394.72,3104.61 2394.72,3094.61
  region net R_X_CTRL_2: 2402.05,3041.67 2420.05,3041.67 2416.05,3033.27 2406.05,3033.27
  region net R_X_CTRL_1: 2289.8,3062.63 2277.07,3075.36 2273.96,3066.59 2281.03,3059.52
  region net LED_3: 3623.12,3390.61 3623.12,3408.61 3614.72,3404.61 3614.72,3394.61
  region net LED_4: 3716.55,3383.48 3710.58,3400.47 3703.8,3394.42 3707.48,3383.96
  region net LED_5: 3813.12,3385.61 3813.12,3403.61 3806.05,3399.61 3806.05,3389.61
  region net LED_8: 3893.12,3000.61 3893.12,3018.61 3884.72,3014.61 3884.72,3004.61
  region net LED_8: 3413.03,3040.36 3400.3,3027.63 3409.07,3024.52 3416.14,3031.59
  region net VDD: 2993.03,3715.36 2980.3,3702.63 2989.07,3699.52 2996.14,3706.59
  region net GND_SENS: 3343.12,4320.61 3343.12,4338.61 3334.72,4334.61 3334.72,4324.61
  region net GND_SENS: 3042.05,3061.67 3060.05,3061.67 3056.05,3053.27 3046.05,3053.27
  region net VCC: 3303.12,3545.61 3303.12,3563.61 3294.72,3559.61 3294.72,3549.61
  region net PIN_SENS_DATA: 2631.8,3861.58 2619.08,3848.85 2615.97,3857.62 2623.04,3864.69
  region net PIN_SENS_DATA: 2256.8,3062.63 2244.08,3075.36 2240.97,3066.59 2248.04,3059.52
  region net PIN_SENS_DATA: 1786.8,2256.58 1774.08,2243.85 1770.97,2252.62 1778.04,2259.69
  region net PIN_LED_DATA: 3008.12,2935.61 3008.12,2953.61 2999.72,2949.61 2999.72,2939.61
  region net U5_10: 2898.12,3970.61 2898.12,3988.61 2889.72,3984.61 2889.72,3974.61
  region net VCC: 2731.8,3912.63 2719.08,3925.36 2715.97,3916.59 2723.04,3909.52
  region net PIN_SENS_LOAD: 1848.99,3023.36 1848.99,3041.36 1857.39,3037.36 1857.39,3027.36
  region net PIN_SENS_LOAD: 2228.12,3090.61 2228.12,3108.61 2219.72,3104.61 2219.72,3094.61
  region net AS_HALF_VCC: 2283.99,2910.61 2283.99,2928.61 2292.39,2924.61 2292.39,2914.61
  region net PIN_SENS_CE: 2838.03,3925.36 2825.3,3912.63 2834.07,3909.52 2841.14,3916.59
  region net PIN_SENS_CE: 2826.8,3936.58 2814.08,3923.85 2810.97,3932.62 2818.04,3939.69
  region net PIN_SENS_CE: 2568.99,3950.61 2568.99,3968.61 2577.39,3964.61 2577.39,3954.61
  region net PIN_SPI_SCK: 4031.8,3612.63 4019.08,3625.36 4015.97,3616.59 4023.04,3609.52
  region net U7_10: 3481.36,4010.74 3475.86,3993.61 3485,3994.61 3488.21,4004.61
  region net PIN_SENS_CE: 3253.12,3870.61 3253.12,3888.61 3244.72,3884.61 3244.72,3874.61
  region net PIN_SENS_CE: 3298.03,3735.36 3285.3,3722.63 3294.07,3719.52 3301.14,3726.59
  region net PIN_SENS_CE: 3696.8,3897.63 3684.08,3910.36 3680.97,3901.59 3688.04,3894.52
  region net U6_10: 3051.8,3557.63 3039.08,3570.36 3035.97,3561.59 3043.04,3554.52
  region net U6_10: 3208.99,3945.61 3208.99,3963.61 3217.39,3959.61 3217.39,3949.61
  region net U6_10: 3253.12,3945.61 3253.12,3963.61 3244.72,3959.61 3244.72,3949.61
  region net PIN_SENS_CE: 1978.03,3875.36 1965.3,3862.63 1974.07,3859.52 1981.14,3866.59
  region net PIN_SPI_SCK: 2262.05,2587.54 2280.05,2587.54 2276.05,2595.94 2266.05,2595.94
  region net PIN_SPI_SCK: 3022.05,3212.54 3040.05,3212.54 3036.05,3220.94 3026.05,3220.94
  region net PIN_LED_LOAD: 3371.8,2487.63 3359.08,2500.36 3355.97,2491.59 3363.04,2484.52
  region net VCC: 3218.03,3505.36 3205.3,3492.63 3214.07,3489.52 3221.14,3496.59
  region net VCC: 3338.12,3405.61 3338.12,3423.61 3329.72,3419.61 3329.72,3409.61
  region net VCC: 3118.12,4020.61 3118.12,4038.61 3109.72,4034.61 3109.72,4024.61
  region net ARDUINO_1: 1658.55,2089.13 1683.55,2089.13 1676.05,2089.61 1666.05,2089.61
  region net AS_VCC: 1733.9,4224.25 1733.9,4199.25 1748.9,4189.68 1748.9,4203.83
  region net PIN_SENS_LOAD: 2249.95,3351 2274.95,3351 2284.52,3366 2270.38,3366
  region net PIN_SENS_LOAD: 2758.36,3786.08 2740.64,3768.44 2756.58,3763.14 2763.66,3770.2
  region net PIN_SENS_LOAD: 2740.77,3823.44 2758.36,3805.68 2763.66,3821.64 2756.62,3828.75
  region net PIN_SENS_LOAD: 3175.8,3330.73 3190.42,3351 3176.03,3356.7 3170.11,3348.48
  region net LED_1: 4447.23,4258.11 4429.56,4275.79 4424.26,4259.88 4431.32,4252.81
  region net BTN_1: 1850.97,4426.26 1833.22,4443.86 1827.91,4428 1835.01,4420.96
  region net BTN_9: 2231.55,4229.41 2206.55,4229.41 2214.05,4214.41 2224.05,4214.41
  region net BTN_17: 2717.15,4426.26 2699.36,4443.82 2694.05,4427.98 2701.17,4420.95
  region net BTN_25: 3274.16,4247.06 3256.46,4229.41 3272.38,4224.1 3279.47,4231.16
  region net BTN_33: 3609.55,4426.26 3584.55,4426.26 3592.05,4411.26 3602.05,4411.26
  region net VDD: 3869.13,2523.63 3889.53,2523.63 3869.1,2538.63 3854.96,2538.63
  region net VDD: 3916.38,2494.06 3898.7,2476.38 3914.61,2471.08 3921.68,2478.15
  region net VCC: 4086.85,2523.63 4111.85,2523.63 4104.35,2538.63 4094.35,2538.63
  region net EXT_AJ_GND': 1740.95,1887.11 1740.94,1912.11 1755.95,1904.61 1755.95,1894.61
  region net AJ_DETECT: 1737.88,1834.11 1713.24,1829.92 1733.67,1814.92 1747.81,1814.92
  region net LED_3: 3525.47,3221.41 3503.78,3233.85 3517.6,3243.22 3526.58,3238.06
  region net LED_4: 3330.47,3179.33 3315.78,3159.1 3332.28,3156.3 3338.23,3164.5
  region net LED_5: 3630.47,3209.88 3615.78,3230.11 3632.28,3232.91 3638.23,3224.72
  region net VCC: 3686.33,3159.1 3671.64,3179.33 3663.87,3164.5 3669.82,3156.3
  region net MAX7219_18: 3829.86,3176.87 3813.53,3157.95 3829.77,3153.82 3836.33,3161.4
  region net LED_1: 3928.07,3217.02 3908.8,3232.96 3924.13,3239.75 3931.87,3233.35
  region net LED_6: 4030.47,3209.88 4015.78,3230.11 4032.28,3232.91 4038.23,3224.72
  region net LED_2: 4098.32,3155.36 4076.64,3167.8 4075.52,3151.15 4084.51,3145.99
  region net LED_G2: 4230.1,2909.76 4215.62,2930.14 4232.15,2932.77 4238.02,2924.5
  region net LED_G5: 3430.1,2879.45 3415.62,2859.08 3432.15,2856.44 3438.02,2864.71

## Silkscreen, mask and mechanical layers (free items; w line width, h text height)
Top Overlay:
  text "3V3" at 1526.05,4192.11 h45
  text "L3" at 1576.35,4096.61 h45
  text "L_X" at 1526.05,3991.61 h45
  text "L_Y" at 1521.95,3891.61 h45
  text "R_X" at 1521.56,3792.11 h45 r359
  text "R_Y" at 1517.46,3691.61 h45 r359
  text "R3" at 1572.25,3592.11 h45
  text "L1" at 1826.05,3587.11 h45
  text "R1" at 1931.05,3587.11 h45
  text "GND" at 1528.05,3491.61 h45
  text "2-L'" at 3576.05,2242.11 h45
  text "5-L" at 3576.05,2147.11 h45
  text "6-R'" at 3576.84,2047.12 h45 r2
  text "3-R" at 3576.05,1947.11 h45
  text "7-GND'" at 3576.45,1847.11 h45 r1
  text "4-GND" at 3576.05,1747.11 h45
  text "8-MIC'" at 3576.45,1647.11 h45 r1
  text "1-MIC" at 3576.05,1547.11 h45